# Altium PCB mackenziepcbpcbrev2.PcbDoc
Units mil, origin at the board's own origin, x right, y up, seen from the top; angles counter-clockwise.
Board outline 6000 x 4000 mil, 2 copper layers (Top Layer, Bottom Layer); 101 components, 66 nets, 363 pads, 51 vias.
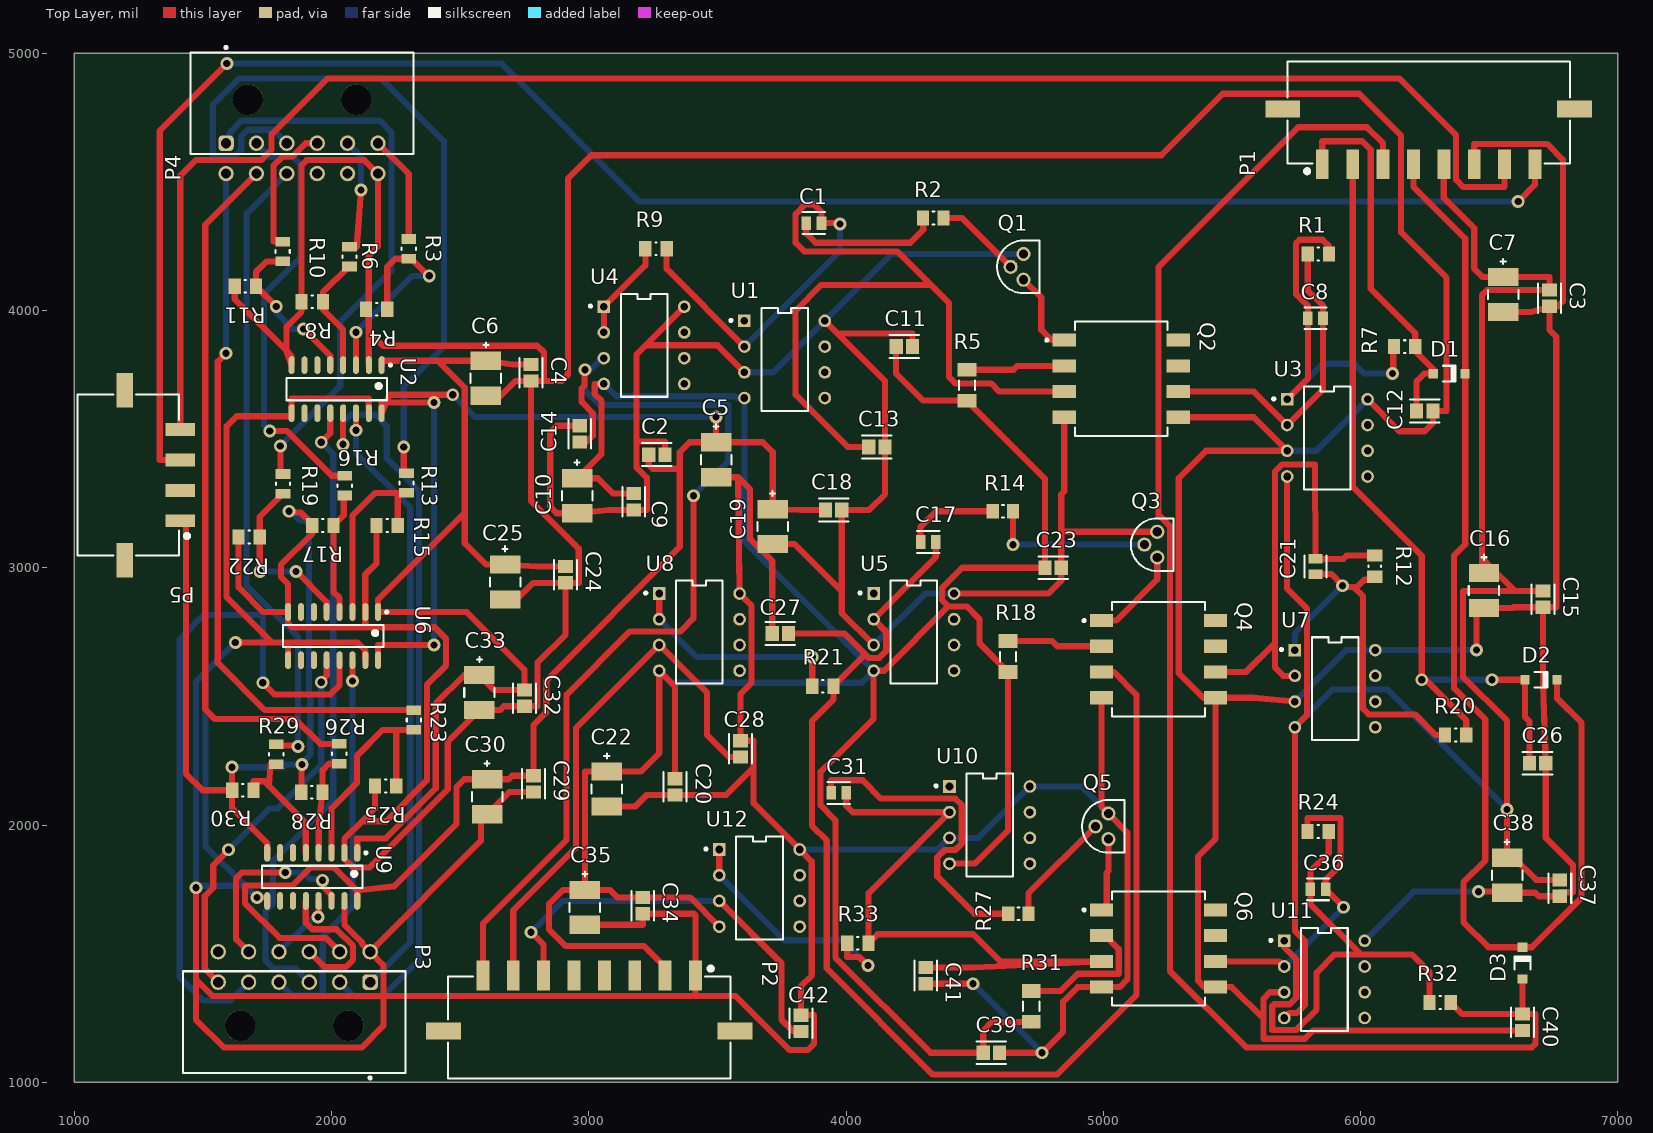
[diagram p0: Top Layer view]
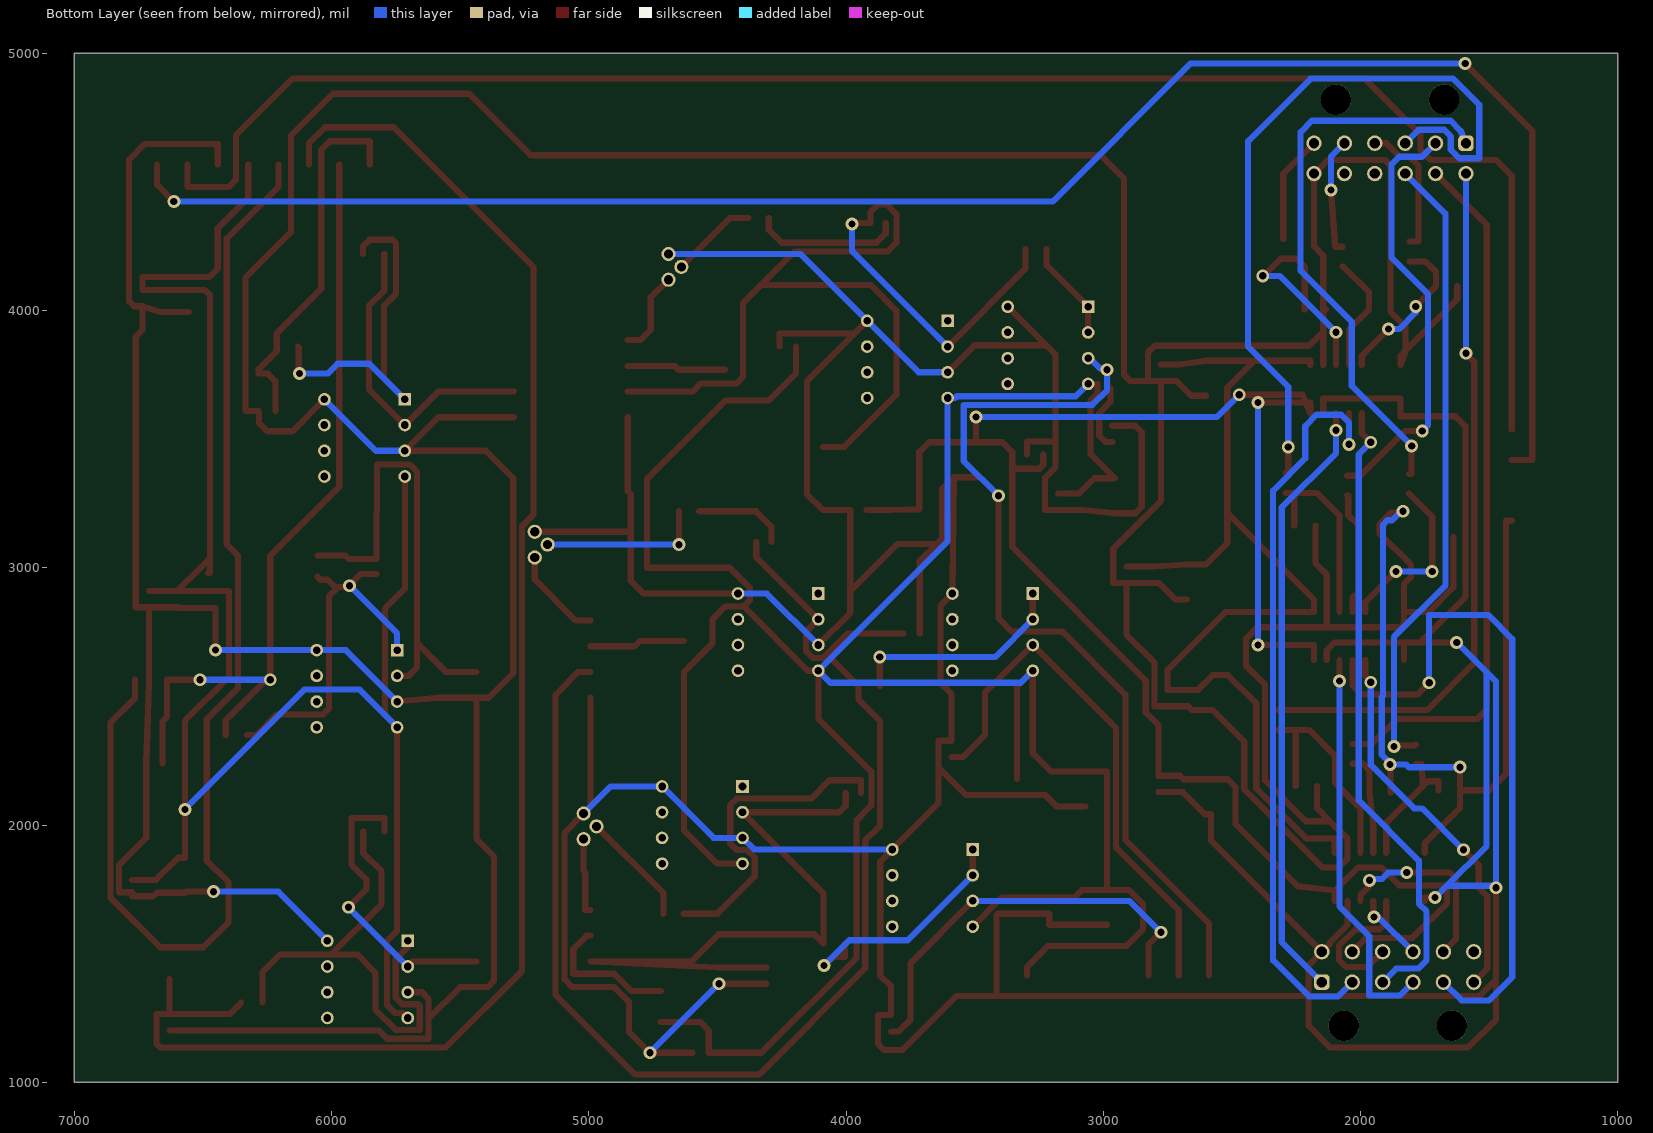
[diagram p1: Bottom Layer view, seen from below]
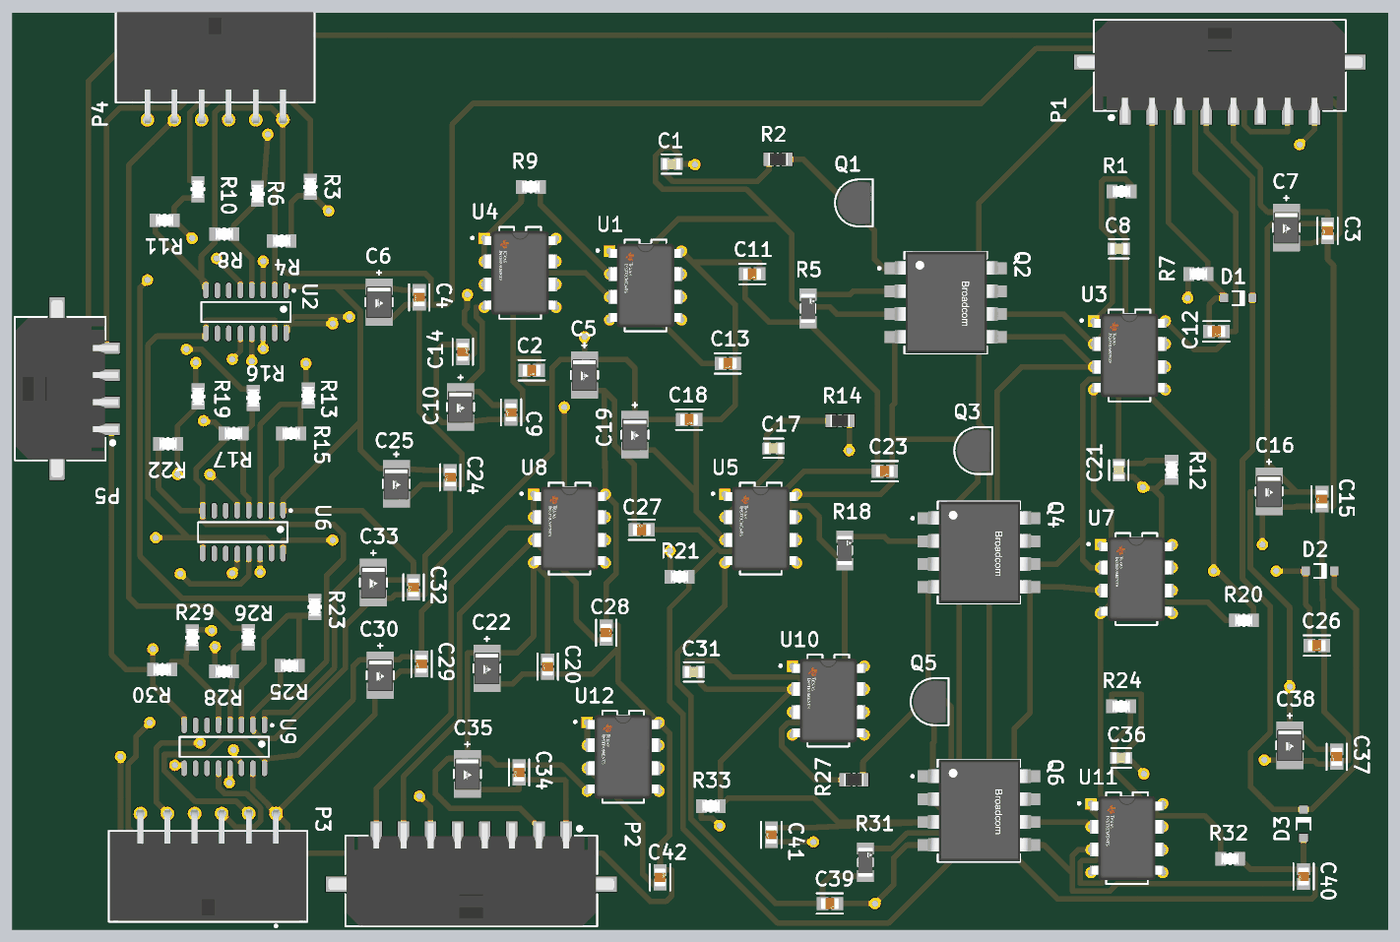
[diagram p2: 3D render of the assembled board from above, using the file's embedded part models]

## Layer stack, top to bottom
Top Solder: solder mask 0.4, Solder Resist, Dk 3.5
Top Layer: signal copper 1.4
Dielectric 1: dielectric 12.6, FR-4, Dk 4.8
Bottom Layer: signal copper 1.4
Bottom Solder: solder mask 0.4, Solder Resist, Dk 3.5

## Board outline
1000,1000 7000,1000 7000,5000 1000,5000

## Design rules (kind name [scope] priority, off if disabled: settings)
Clearance Clearance_1 [All] p1: gap=10 ignorepadtopadclearanceinfootprint=FALSE
Clearance [All] p2: gap=10 ignorepadtopadclearanceinfootprint=FALSE
HoleSize [All] p1: absolutevalues=TRUE maxlimit=120 minlimit=1 maxpercent=80.000 minpercent=20.000
PolygonConnect [All] p1: connectstyle=Relief reliefconductorwidth=10 reliefentries=4 polygonreliefangle="90 Angle" airgapwidth=10
RoutingVias [All] p1: holewidth=28 width=50 viastyle="Through Hole" minholewidth=28 minwidth=50 maxholewidth=28 maxwidth=50
SilkToSolderMaskClearance [IsPad] p1: minsilkscreentomaskgap=7.87 clearancetoexposedcopper=TRUE
SolderMaskExpansion [All] p1: expansion=4 istentingtop=FALSE
SupplyNets "Schematic Supply Nets_6" [InNet('15V0')] p1: voltage=0.000
SupplyNets "Schematic Supply Nets_3" [InNet('iso-5V0')] p2: voltage=0.000
SupplyNets "Schematic Supply Nets_2" [InNet('PGND')] p3: voltage=0.000
SupplyNets "Schematic Supply Nets" [InNet('3V3')] p4: voltage=0.000
SupplyNets "Schematic Supply Nets_5" [InNet('iso 15')] p5: voltage=0.000
SupplyNets "Schematic Supply Nets_4" [InNet('3.3V')] p6: voltage=0.000
SupplyNets "Schematic Supply Nets_1" [InNet('GND')] p7: voltage=0.000
Width [All] p1: maxlimit=24 minlimit=24 preferedwidth=24 minimp=50.000000 maximp=50.000000 favimp=50.000000
28 further rules are at their usual default settings.

## Components (designator, comment, footprint, x,y, rotation, side; value= is the part's Value field where it differs from the comment)
C1 "C0805C101K5GACTU" FP-C0805C-DN-MFG 3875,4340 r0 top value="100 pF"
C2 "08051C104K4T2A" FP-0805-L_2_01_0_2-W_1_25-IPC_B 3265,3440 r0 top
C3 "08051C104K4T2A" FP-0805-L_2_01_0_2-W_1_25-IPC_B 6735,4048.28 r270 top
C4 "08051C104K4T2A" FP-0805-L_2_01_0_2-W_1_25-IPC_B 2775,3758.28 r270 top
C5 "293D106X9010B2TE3" FP-293DB-MFG 3495,3420 r90 top
C6 "293D106X9010B2TE3" FP-293DB-MFG 2600,3737.09 r90 top
C7 "293D106X9010B2TE3" FP-293DB-MFG 6555,4062.09 r90 top
C8 "C0805C101K5GACTU" FP-C0805C-DN-MFG 5825,3970 r0 top value="100 pF"
C9 "08051C104K4T2A" FP-0805-L_2_01_0_2-W_1_25-IPC_B 3175,3256.72 r270 top
C10 "293D106X9010B2TE3" FP-293DB-MFG 2955,3280 r90 top
C11 "08051C104K4T2A" FP-0805-L_2_01_0_2-W_1_25-IPC_B 4226.72,3860 r0 top
C12 "08051C104K4T2A" FP-0805-L_2_01_0_2-W_1_25-IPC_B 6250,3610 r0 top
C13 "08051C104K4T2A" FP-0805-L_2_01_0_2-W_1_25-IPC_B 4120,3470 r0 top
C14 "08051C104K4T2A" FP-0805-L_2_01_0_2-W_1_25-IPC_B 2965,3520.75 r90 top
C15 "08051C104K4T2A" FP-0805-L_2_01_0_2-W_1_25-IPC_B 6710,2878.28 r270 top
C16 "293D106X9010B2TE3" FP-293DB-MFG 6480,2912.09 r90 top
C17 "C0805C101K5GACTU" FP-C0805C-DN-MFG 4319.53,3100 r0 top value="100 pF"
C18 "08051C104K4T2A" FP-0805-L_2_01_0_2-W_1_25-IPC_B 3951.72,3225 r0 top
C19 "293D106X9010B2TE3" FP-293DB-MFG 3715,3160 r90 top
C20 "08051C104K4T2A" FP-0805-L_2_01_0_2-W_1_25-IPC_B 3335,2148.28 r270 top
C21 "C0805C101K5GACTU" FP-C0805C-DN-MFG 5825,3005 r90 top value="100 pF"
C22 "293D106X9010B2TE3" FP-293DB-MFG 3070,2140 r90 top
C23 "08051C104K4T2A" FP-0805-L_2_01_0_2-W_1_25-IPC_B 4805,3000 r0 top
C24 "08051C104K4T2A" FP-0805-L_2_01_0_2-W_1_25-IPC_B 2910,2973.28 r270 top
C25 "293D106X9010B2TE3" FP-293DB-MFG 2675,2945 r90 top
C26 "08051C104K4T2A" FP-0805-L_2_01_0_2-W_1_25-IPC_B 6688.28,2240 r0 top
C27 "08051C104K4T2A" FP-0805-L_2_01_0_2-W_1_25-IPC_B 3745,2745 r180 top
C28 "08051C104K4T2A" FP-0805-L_2_01_0_2-W_1_25-IPC_B 3590,2295.75 r90 top
C29 "08051C104K4T2A" FP-0805-L_2_01_0_2-W_1_25-IPC_B 2785,2160 r270 top
C30 "293D106X9010B2TE3" FP-293DB-MFG 2605,2110 r90 top
C31 "C0805C101K5GACTU" FP-C0805C-DN-MFG 3971.57,2125 r0 top value="100 pF"
C32 "08051C104K4T2A" FP-0805-L_2_01_0_2-W_1_25-IPC_B 2750,2493.28 r270 top
C33 "293D106X9010B2TE3" FP-293DB-MFG 2575,2515 r90 top
C34 "08051C104K4T2A" FP-0805-L_2_01_0_2-W_1_25-IPC_B 3210,1686.72 r270 top
C35 "293D106X9010B2TE3" FP-293DB-MFG 2985,1680 r90 top
C36 "C0805C101K5GACTU" FP-C0805C-DN-MFG 5835,1750 r0 top value="100 pF"
C37 "08051C104K4T2A" FP-0805-L_2_01_0_2-W_1_25-IPC_B 6775,1755 r270 top
C38 "293D106X9010B2TE3" FP-293DB-MFG 6570,1805 r90 top
C39 "08051C104K4T2A" FP-0805-L_2_01_0_2-W_1_25-IPC_B 4565,1115 r0 top
C40 "08051C104K4T2A" FP-0805-L_2_01_0_2-W_1_25-IPC_B 6630,1233.28 r270 top
C41 "08051C104K4T2A" FP-0805-L_2_01_0_2-W_1_25-IPC_B 4310,1415 r270 top
C42 "08051C104K4T2A" FP-0805-L_2_01_0_2-W_1_25-IPC_B 3825,1229.25 r90 top
D1 "1N4148W-7-F" DIOD-SOD123-2_V 6345,3755 r0 top
D2 "1N4148W-7-F" DIOD-SOD123-2_V 6702.01,2565 r0 top
D3 "1N4148W-7-F" DIOD-SOD123-2_V 6630,1462.99 r90 top
P1 "662108145021" 662108145021 6265,4770 r180 top
P2 "662108145021" 662108145021 3001.61,1213.43 r0 top
P3 "66201221022" 66201221022 1854.76,1233.78 r0 top
P4 "66201221022" 66201221022 1885.24,4806.22 r180 top
P5 "662104145021" 662104145021 1210,3360 r270 top
Q1 "MPS2907ARLRAG" FP-29-11-MFG 4670.02,4170 r0 top
Q2 "HCNR201-500E" FP-HCNR201-500E-MFG 5070,3735 r0 top
Q3 "MPS2907ARLRAG" FP-29-11-MFG 5190.02,3090 r0 top
Q4 "HCNR201-500E" FP-HCNR201-500E-MFG 5215,2645 r0 top
Q5 "MPS2907ARLRAG" FP-29-11-MFG 5000.02,1995 r0 top
Q6 "HCNR201-500E" FP-HCNR201-500E-MFG 5215,1520 r0 top
R1 "CRCW080580K6FKEA" FP-CRCW0805-e3-IPC_A 5836.37,4220 r0 top
R2 "RC0805FR-071KL" RESC2013X60X35ML10T20 4339.37,4360 r0 top
R3 "CRCW080549R9FKEA" FP-CRCW0805-e3-MFG 2300,4240 r270 top
R4 "CRCW080510K0FKEA" FP-CRCW0805-e3-IPC_A 2175,4004.69 r180 top
R5 "CRCW1206300RFKEA" FP-CRCW1206-e3-IPC_A 4470,3710 r90 top
R6 "CRCW080549R9FKEA" FP-CRCW0805-e3-MFG 2070,4209.69 r270 top
R7 "CRCW080510K0FKEA" FP-CRCW0805-e3-IPC_A 6171.37,3860 r0 top
R8 "CRCW080510K0FKEA" FP-CRCW0805-e3-IPC_A 1925,4034.69 r180 top
R9 "CRCW080580K6FKEA" FP-CRCW0805-e3-IPC_A 3261.37,4240 r0 top
R10 "CRCW080549R9FKEA" FP-CRCW0805-e3-MFG 1810,4229.69 r270 top
R11 "CRCW080510K0FKEA" FP-CRCW0805-e3-IPC_A 1665,4094.69 r180 top
R12 "CRCW080580K6FKEA" FP-CRCW0805-e3-IPC_A 6055,3006.37 r270 top
R13 "CRCW080549R9FKEA" FP-CRCW0805-e3-MFG 2291.26,3329.69 r270 top
R14 "RC0805FR-071KL" RESC2013X60X35ML10T20 4610,3220 r0 top
R15 "CRCW080510K0FKEA" FP-CRCW0805-e3-IPC_A 2216.26,3164.69 r180 top
R16 "CRCW080549R9FKEA" FP-CRCW0805-e3-MFG 2051.26,3319.69 r270 top
R17 "CRCW080510K0FKEA" FP-CRCW0805-e3-IPC_A 1966.26,3164.69 r180 top
R18 "CRCW1206300RFKEA" FP-CRCW1206-e3-IPC_A 4630,2655 r90 top
R19 "CRCW080549R9FKEA" FP-CRCW0805-e3-MFG 1811.26,3326.3 r270 top
R20 "CRCW080510K0FKEA" FP-CRCW0805-e3-IPC_A 6370,2350 r0 top
R21 "CRCW080580K6FKEA" FP-CRCW0805-e3-IPC_A 3910,2540 r0 top
R22 "CRCW080510K0FKEA" FP-CRCW0805-e3-IPC_A 1679.88,3119.69 r180 top
R23 "CRCW080549R9FKEA" FP-CRCW0805-e3-MFG 2320,2408.39 r270 top
R24 "CRCW080580K6FKEA" FP-CRCW0805-e3-IPC_A 5835,1975 r0 top
R25 "CRCW080510K0FKEA" FP-CRCW0805-e3-IPC_A 2210,2152 r180 top
R26 "CRCW080549R9FKEA" FP-CRCW0805-e3-MFG 2030,2277 r270 top
R27 "RC0805FR-071KL" RESC2013X60X35ML10T20 4670,1655 r0 top
R28 "CRCW080510K0FKEA" FP-CRCW0805-e3-IPC_A 1923.63,2127 r180 top
R29 "CRCW080549R9FKEA" FP-CRCW0805-e3-MFG 1785,2275 r270 top
R30 "CRCW080510K0FKEA" FP-CRCW0805-e3-IPC_A 1655,2135 r180 top
R31 "CRCW1206300RFKEA" FP-CRCW1206-e3-IPC_A 4720,1295 r90 top
R32 "CRCW080510K0FKEA" FP-CRCW0805-e3-IPC_A 6310,1310 r0 top
R33 "CRCW080580K6FKEA" FP-CRCW0805-e3-IPC_A 4046.37,1540 r0 top
U1 "LM358AN/NOPB" FP-P0008A-MFG 3761.3,3810 r0 top
U2 "Si8635BC-B-IS1" SLAB-SOIC-16-NB_L 2020,3694.69 r270 top
U3 "LM358AN/NOPB" FP-P0008A-MFG 5871.3,3505 r0 top
U4 "LM358AN/NOPB" FP-P0008A-MFG 3215,3865 r0 top
U5 "LM358AN/NOPB" FP-P0008A-MFG 4263.7,2750 r0 top
U6 "Si8635BC-B-IS1" SLAB-SOIC-16-NB_L 2006.26,2734.69 r270 top
U7 "LM358AN/NOPB" FP-P0008A-MFG 5901.3,2530 r0 top
U8 "LM358AN/NOPB" FP-P0008A-MFG 3430,2750 r0 top
U9 "Si8635BC-B-IS1" SLAB-SOIC-16-NB_L 1925,1798.5 r270 top
U10 "LM358AN/NOPB" FP-P0008A-MFG 4558.7,2000 r0 top
U11 "LM358AN/NOPB" FP-P0008A-MFG 5860,1400 r0 top
U12 "LM358AN/NOPB" FP-P0008A-MFG 3663.7,1755 r0 top

## Footprints (in the part's own frame and the unit in brackets; to place one, negate y for a bottom-side part, rotate by r counter-clockwise, add the part's x,y. Pads: shape width x height; smd on the part's side, far side on the other; paste and mask are expansions set on the pad)
66201221022 [mm] "Dual row Right angle header With plastic peg 12p"
  rrect50% 1.52x1.52 hole 1.02: 1(7.5,3.95)
  round 1.52 hole 1.02: 2(4.5,3.95) 3(1.5,3.95) 4(-1.5,3.95) 5(-4.5,3.95) 6(-7.5,3.95) 7(7.5,6.95) 8(4.5,6.95) 9(1.5,6.95) 10(-1.5,6.95) 11(-4.5,6.95) 12(-7.5,6.95)
  round 3 hole 3 unplated: MH1(-5.34,-0.35) MH2(5.34,-0.35)
  silkscreen extent -11,-5.62 11,5.02, body extent -10.85,-4.95 10.85,7.27, height 8.79
662104145021 [mm] "3.00mm Male Single Row Angled Header, 4p"
  rect 1.27x2.92 smd: 1(4.5,5.12) 2(1.5,5.12) 3(-1.5,5.12) 4(-4.5,5.12)
  rect 3.43x1.65 smd: MP1(-8.395,-0.35) MP2(8.395,-0.35)
  silkscreen extent -7.95,-5.03 7.95,6, body extent -9.82,-4.95 9.82,6.4, height 5.61
662108145021 [mm] "3.00mm Male Single Row Angled Header, 8p"
  rect 1.27x2.92 smd: 1(10.5,5.12) 2(7.5,5.12) 3(4.5,5.12) 4(1.5,5.12) 5(-1.5,5.12) 6(-4.5,5.12) 7(-7.5,5.12) 8(-10.5,5.12)
  rect 3.43x1.65 smd: MP1(-14.395,-0.35) MP2(14.395,-0.35)
  silkscreen extent -13.95,-5.02 13.95,6, body extent -15.82,-4.95 15.82,6.4, height 5.61
DIOD-SOD123-2_V [mm] "SOD123, 2-Leads, Body 2.7x1.55mm, Height 1.45mm"
  rect 0.9x0.95 smd: 1(-1.575,0) 2(1.575,0)
  silkscreen extent -0.64,-0.82 0.64,0.78, body extent -1.35,-0.77 1.35,0.77, height 1.45
FP-29-11-MFG [mm]
  round 1.4 hole 0.9 paste-2539.97 mask+0: 1(0.507,-1.27) 2(-0.763,0) 3(0.507,1.27)
  silkscreen extent -2.09,-2.6 2.09,2.6, body extent -2.19,-2.7 2.19,2.7, height 0.25
FP-293DB-MFG [mm]
  rect 1.8x3 smd paste+0 mask+0: 1(-1.725,0) 2(1.725,0)
  silkscreen extent -0.45,-1.5 3.53,1.5, body extent -2.73,-1.6 2.73,1.6, height 0.25
FP-0805-L_2_01_0_2-W_1_25-IPC_B [mil]
  rect 51.36x57.33 smd paste+0 mask+0: 1(-31.72,0) 2(31.72,0)
  silkscreen extent -57,-44 57,44, body extent -67,-39 67,39, height 10
FP-C0805C-DN-MFG [mm]
  rect 0.95x1.35 smd paste+0 mask+0: 1(-0.75,0) 2(0.75,0)
  silkscreen extent -1.1,-1.07 1.1,1.07, body extent -1.4,-0.85 1.4,0.85, height 0.25
FP-CRCW0805-e3-IPC_A [mil]
  rect 47.5x59.38 smd paste+0 mask+0: 1(-41.37,0) 2(41.37,0)
  silkscreen extent -3,-25 3,25, body extent -85,-49 85,49, height 10
FP-CRCW0805-e3-MFG [mm]
  rect 0.95x1.45 smd paste+0 mask+0: 1(-0.975,0) 2(0.975,0)
  silkscreen extent -0.13,-0.7 0.13,0.7, body extent -1.55,-0.82 1.55,0.82, height 0.25
FP-CRCW1206-e3-IPC_A [mil]
  rect 53.39x73.16 smd paste+0 mask+0: 1(-60.08,0) 2(60.08,0)
  silkscreen extent -19,-31 19,31, body extent -106,-56 106,56, height 10
FP-HCNR201-500E-MFG [mm]
  rect 2.29x1.3 smd paste+0 mask+0: 1(-5.635,3.81) 2(-5.635,1.27) 3(-5.635,-1.27) 4(-5.635,-3.81) 5(5.635,-3.81) 6(5.635,-1.27) 7(5.635,1.27) 8(5.635,3.81)
  silkscreen extent -7.47,-5.65 4.57,5.65, body extent -6.88,-5.75 6.88,5.75, height 0.25
FP-P0008A-MFG [mm]
  rect 1.25x1.25 hole 0.75 paste-2539.97 mask+0: 1(-3.97,3.81)
  round 1.25 hole 0.75 paste-2539.97 mask+0: 2(-3.97,1.27) 3(-3.97,-1.27) 4(-3.97,-3.81) 5(3.97,-3.81) 6(3.97,-1.27) 7(3.97,1.27) 8(3.97,3.81)
  silkscreen extent -5.42,-5.08 2.3,5.08, body extent -4.69,-5.18 4.69,5.18, height 0.25
RESC2013X60X35ML10T20 [mm] "Chip Resistor, 2-Leads, Body 2.1x1.35mm, IPC Low Density"
  rect 1.2x1.45 smd: 1(-1,0) 2(1,0)
  silkscreen extent -0.1,-0.62 0.1,0.62, body extent -1.05,-0.68 1.05,0.67, height 0.6
SLAB-SOIC-16-NB_L [mm] "SOIC, 16-Leads, Body 9.9x3.9mm, Pitch 1.27mm, IPC High Density"
  oval 1.75x0.6 smd: 1(-2.375,4.445) 2(-2.375,3.175) 3(-2.375,1.905) 4(-2.375,0.635) 5(-2.375,-0.635) 6(-2.375,-1.905) 7(-2.375,-3.175) 8(-2.375,-4.445) 9(2.375,-4.445) 10(2.375,-3.175) 11(2.375,-1.905) 12(2.375,-0.635) 13(2.375,0.635) 14(2.375,1.905) 15(2.375,3.175) 16(2.375,4.445)
  silkscreen extent -2.5,-4.95 1.1,5.42, body extent -1.95,-4.95 1.95,4.95, height 1.75

## Part data
C1 C8 C17 C21 C31 C36: library part CMP-03020-021029-1, "CAP CER 100PF 50V C0G/NP0 0805", Capacitance="100 pF", Manufacturer=KEMET, Package=C0805C-DN, Temperature="-55°C to +125°C", Temperature Characteristic=C0G, Temperature Coefficient=30ppm/°C, Temperature Range High=+125°C, Temperature Range Low=-55°C, Tolerance=0.1, Voltage Rating="50 V", Automotive=No, Category=Cap, ComponentLink2Description=Datasheet, ComponentLink2URL=https://content.kemet.com/datasheets/KEM_C1003_C0G_SMD.pdf, Device Class L1="Passive Components", Device Class L2=Capacitors, Device Class L3="Ceramic Capacitors", Digikey Description="CAP CER 100PF 50V C0G/NP0 0805", Height=0.88mm, Ipc Land Pattern Name=CAPC200125X78, Lead Free=Yes, Manufacturer Part Number=C0805C101K5GACTU, Material=Ceramic, Mouser Description="Multilayer Ceramic Capacitors MLCC - SMD/SMT 50volts 100pF C0G 10%", Octopart=https://octopart.com/c0805c101k5gactu-kemet-109877, RoHS=TRUE
C2 C3 C4 C9 C11 C12 C13 C14 C15 C18 C20 C23 C24 C26 C27 C28 C29 C32 C34 C37 C39 C40 C41 C42: library part CMP-2007-04172-2, "Automotive Ceramic Capacitor, 0805, 100nF, 10%, X7R, 15%, 100V", Capacitance=100nF, Case Code (Imperial)=0805, Case Code (Metric)=2012, Dielectric=X7R, Dielectric Material=Ceramic, Max Operating Temperature=125°C, Min Operating Temperature=-55°C, Package Quantity=1, Ratings=AEC-Q200, Tolerance=10%, Voltage=100V, Case/Package=0805, Construction=Flat, Depth=1.25mm, Height=1.4mm, Lead Free="Lead Free", Length=2.01mm, Mount="Surface Mount", Number of Pins=2, Packaging="Tape and Reel", Radiation Hardening=No, REACH SVHC="No SVHC", RoHS Compliant=Yes, Series=-, Termination=SMD/SMT, Thickness=0.055inch, Voltage Rating=100V, Voltage Rating (DC)=100V, Width=0.049inch
C5 C6 C7 C10 C16 C19 C22 C25 C30 C33 C35 C38: library part CMP-02414-000013-1, "CAP TANT 10UF 10% 10V 1411", Capacitance=10uF, Case Code (Imperial)=1411, Case Code (Metric)=3528, Dielectric Material=Tantalum, ESR (Equivalent Series Resistance)=2.5R, Leakage Current=1uA, Max Operating Temperature=125°C, Min Operating Temperature=-55°C, Package Quantity=2000, Ripple Current=150mA, Tolerance=10%, Voltage=10V, Case/Package=1411, Construction=Flat, Depth=2.8mm, Dissipation Factor=6%, Features="General Purpose", Height=1.9mm, Height - Seated (Max)=0.083inch, Lead Free="Lead Free", Length=3.5mm, Mount="Surface Mount", Packaging="Tape and Reel", Polarity=Polar, Q Factor=6, Radiation Hardening=No, RoHS Compliant=Yes, Series="TANTAMOUNT®, 293D", Termination=SMD/SMT, Voltage Rating=10V, Voltage Rating (DC)=10V, Width=1.9mm
D1 D2 D3: library part CMP-2000-04932-2, "Fast Switching Diode, 100 V, 0.15 A, -65 to 150 degC, 2-Pin?SOD123, RoHS, Tape and Reel", If - Forward Current=0.15A, Ir - Reverse Current=1uA, Manufacturer=DiodesIncorporated, Max Surge Current=2A, Maximum Operating Temperature=+150C, Minimum Operating Temperature=-65C, Operating Temperature Range=-65Cto+150C, Package / Case=SOD-123, Package Reference=SOD123-2, Peak Reverse Voltage=100V, Vf - Forward Voltage=1.25V, Brand=DiodesIncorporated, Configuration=Single, Datasheet URL=http://www.farnell.com/datasheets/1915529.pdf, Datasheet Version="Rev. 24-2, 10/2013", Factory Pack Quantity=3000, Height=1.25mm, Length=2.85mm, Manufacturer URL=http://www.diodes.com/, Mounting Style=SMD/SMT, Package URL=http://www.diodes.com/datasheets/ds18004.pdf, Packaging=Reel, Product=SwitchingDiodes, Product Category=Diodes-GeneralPurpose,Power,Switching, Recovery Time=4ns, RoHS=True, Series=1N4148, Type=SwitchingDiode, Unit Weight=0.000353oz, Width=1.7mm
P1 P2: library part CMP-1502-00488-2, Color=Black, Contact Resistance=10mΩ, Current Rating=5A, Insulation Resistance=1GΩ, Max Operating Temperature=105°C, Min Operating Temperature=-40°C, Operating Supply Voltage=250V, Connector Type="Male Pin, Socket", Contact Material=Copper, Contact Plating=Tin, Fastening Type=Ramp, Gender=Male, Height=14mm, Lead Pitch=3mm, Length=27.65mm, Mount="Surface Mount", NexarPartId=23024787, Number of Contacts=8, Number of Pins=8, Number of Positions=8, Number of Rows=1, Packaging="Tape and Reel", Pitch=3mm, REACH SVHC=Unknown, RoHS=Compliant, Termination=Solder, Width=12.85mm
P3 P4: library part CMP-1502-00369-2, Color=Black, Contact Resistance=10mΩ, Current Rating=5A, Insulation Resistance=1GΩ, Max Operating Temperature=105°C, Min Operating Temperature=-40°C, Operating Supply Voltage=250V, Connector Type="Male Pin, Socket", Contact Material=Copper, Contact Plating=Tin, Fastening Type=Latch, Gender=Male, Height=8.9mm, Lead Pitch=3mm, Length=21.7mm, Mount="Through Hole", NexarPartId=23024718, Number of Contacts=12, Number of Pins=12, Number of Positions=12, Number of Rows=2, Pitch=3mm, REACH SVHC=Unknown, RoHS=Compliant, Row Spacing=2.9972mm, Termination=Solder, Width=21.7mm
P5: library part CMP-1502-00484-2, Color=Black, Contact Resistance=10mΩ, Current Rating=5A, Insulation Resistance=1GΩ, Max Operating Temperature=105°C, Min Operating Temperature=-40°C, Operating Supply Voltage=250V, Connector Type="Male Pin, Socket", Contact Material=Copper, Contact Plating=Tin, Fastening Type=Ramp, Gender=Male, Height=14mm, Lead Pitch=3mm, Length=15.65mm, Mount="Surface Mount", NexarPartId=23024783, Number of Contacts=4, Number of Pins=4, Number of Positions=4, Number of Rows=1, Packaging="Tape and Reel", Pitch=3mm, REACH SVHC=Unknown, RoHS=Compliant, Termination=Solder, Width=6.85mm
Q1 Q3 Q5: library part CMP-1048-01537-2, Case/Package=TO-92, Collector Base Voltage (VCBO)=-60V, Collector Emitter Saturation Voltage=-1.6V, Current Rating=-600mA, Emitter Base Voltage (VEBO)=-5V, Frequency=200MHz, Manufacturer Lifecycle Status=OBSOLETE, Max Breakdown Voltage=60V, Max Collector Current=600mA, Max Junction Temperature (Tj)=150°C, Max Power Dissipation=625mW, Min Operating Temperature=-55°C, Collector Emitter Breakdown Voltage=-60V, Collector Emitter Voltage (VCEO)=-60V, Contact Plating="Copper, Silver, Tin", Element Configuration=Single, Gain Bandwidth Product=200MHz, Height=5.33mm, hFE Min=75, Lead Free="Lead Free", Length=5.2mm, Lifecycle Status=Obsolete, Max Frequency=200MHz, Max Operating Temperature=150°C, NexarPartId=358202, Number of Elements=1, Number of Pins=3, Packaging="Cut Tape", Polarity=PNP, Power Dissipation=625mW, Radiation Hardening=No, REACH SVHC=Unknown, RoHS=Compliant, Schedule B=8541210080, Transition Frequency=200MHz, Voltage Rating (DC)=-60V, Width=4.19mm
Q2 Q4 Q6: library part CMP-18400-000025-2, "OPTOISO 5KV LINEAR PHVOLT 8DIPGW", Case/Package=SMD/SMT, Current Transfer Ratio=0.72%, Forward Current=25mA, Forward Voltage=1.6V, Input Current=20mA, Isolation Voltage=5kV, Max Operating Temperature=100°C, Max Power Dissipation=60mW, Min Operating Temperature=-55°C, Output Voltage=15V, Package Quantity=1, Reverse Breakdown Voltage=2.5V, Contact Plating=Tin, Input Type=DC, Isolation Voltage-Max=5kV, Lead Free="Lead Free", Max Input Current=25mA, Mount="Surface Mount", Number of Channels=1, Number of Elements=1, Number of Pins=8, Packaging="Tape and Reel", Power Dissipation=60mW, Radiation Hardening=No, REACH SVHC="No SVHC", Reverse Voltage (DC)=2.5V, RoHS Compliant=Yes, Series=-
R1 R9 R12 R21 R24 R33: library part CMP-2001-04127-2, "RES Thick Film, 80.6kΩ, 1%, 0.125W, 100ppm/°C, 0805", Case Code (Imperial)=0805, Case Code (Metric)=2012, Max Operating Temperature=155°C, Max Power Dissipation=125mW, Min Operating Temperature=-55°C, Package Quantity=10, Resistance=80.6kR, Temperature Coefficient=100ppm/°C, Tolerance=1%, Voltage Rating=150V, Case/Package=0805, Composition="Thick Film", Contact Plating=Tin, Depth=1.25mm, Features="Automotive AEC-Q200", Height=0.45mm, Lead Free="Lead Free", Length=2mm, Military Standard=Not, Number of Pins=2, Number of Terminations=2, Packaging="Tape and Reel", Power Rating=125mW, Radiation Hardening=No, Termination=Solder, Voltage Rating (DC)=150V, Weight=0.000194oz, Width=1.25mm
R2 R14 R27: library part CMP-2100-03671-1, "Chip Resistor, 1 KOhm, +/- 1%, 125 mW, -55 to 155 degC, 0805 (2012 Metric), RoHS, Tape and Reel", Case Code (Imperial)=0805, Case Code (Metric)=2012, Manufacturer=Yageo, Max Operating Temperature=155degC, Max Power Dissipation=125mW, Min Operating Temperature=-55degC, Package Description="2-Pin Surface Mounted Device, Body 2 x 1.25 mm", Package Quantity=1, Resistance=1KOhm, Temperature Coefficient=100ppm/degreesC, Tolerance=1%, Voltage Rating=150V, Case/Package=0805, Composition=ThickFilm, Datasheet URL=http://www.yageo.com/NewPortal/yageodocoutput?fileName=/pdf/R-Chip/PYu-RC_Group_51_RoHS_L_5.pdf, Datasheet Version="Rev. 5, 10/2016", Depth=1.25mm, Height=0.024inch, Lead Free=LeadFree, Length=0.079inch, Manufacturer URL=http://www.yageo.com/, Military Standard=Not, Number of Pins=2, Number of Terminations=2, Package Reference=0805, Packaging=TapeandReel, Power Rating=125mW, REACH SVHC=Unknown, RoHSCompliant=true, Termination=SMD/SMT, Voltage Rating (DC)=150V, Width=0.049inch
R3 R6 R10 R13 R16 R19 R23 R26 R29: library part CMP-2001-03954-2, "RES Thick Film, 49.9Ω, 1%, 0.125W, 100ppm/°C, 0805", Case Code (Imperial)=0805, Case Code (Metric)=2012, Max Operating Temperature=155°C, Max Power Dissipation=125mW, Min Operating Temperature=-55°C, Package Quantity=10, Resistance=49.9R, Temperature Coefficient=100ppm/°C, Tolerance=1%, Voltage Rating=150V, Case/Package=0805, Composition="Thick Film", Contact Plating=Tin, Depth=1.25mm, Features="Automotive AEC-Q200", Height=0.45mm, Lead Free="Lead Free", Length=2mm, Military Standard=Not, Number of Terminations=2, Packaging="Tape and Reel", Power Rating=125mW, Termination=SMD/SMT, Voltage Rating (DC)=150V, Weight=0.000194oz, Width=1.25mm
R4 R7 R8 R11 R15 R17 R20 R22 R25 R28 R30 R32: library part CMP-2001-04908-2, "RES Thick Film, 10kΩ, 1%, 0.125W, 100ppm/°C, 0805", Case Code (Imperial)=0805, Case Code (Metric)=2012, Max Operating Temperature=155°C, Min Operating Temperature=-55°C, Package Quantity=5000, Power Rating=125mW, Resistance=10kR, Temperature Coefficient=100ppm/°C, Tolerance=1%, Voltage Rating=150V, Case/Package=0805, Composition="Thick Film", Contact Plating=Tin, Depth=1.25mm, Height=0.45mm, Lead Free="Lead Free", Length=2mm, Military Standard=Not, Packaging="Tape and Reel", Radiation Hardening=No, Termination=SMD/SMT, Voltage Rating (DC)=150V, Weight=0.000194oz, Width=1.25mm
R5 R18 R31: library part CMP-1014-00449-3, "RES Thick Film, 300Ω, 1%, 0.25W, 100ppm/°C, 1206", Case Code (Imperial)=1206, Case Code (Metric)=3216, Max Operating Temperature=155°C, Max Power Dissipation=250mW, Min Operating Temperature=-55°C, Package Quantity=10, Resistance=300R, Temperature Coefficient=100ppm/°C, Tolerance=1%, Voltage Rating=200V, Case/Package=1206, Composition="Thick Film", Contact Plating=Tin, Depth=1.6mm, Features="Automotive AEC-Q200", Height=0.55mm, Lead Free="Lead Free", Length=3.2mm, Military Standard=Not, Mount="Surface Mount", Number of Terminations=2, Packaging="Tape and Reel", Power Rating=250mW, Radiation Hardening=No, Termination=SMD/SMT, Voltage Rating (DC)=200V, Weight=0.000353oz, Width=0.063inch, Working Voltage=200V
U1 U3 U4 U5 U7 U8 U10 U11 U12: library part CMP-04895-000025-1, "IC OPAMP GP 2 CIRCUIT 8DIP", Input Bias Current=0.045uA, Input Offset Voltage=2mV, Manufacturer="Texas Instruments", Max Dual Supply Voltage=16V, Max Supply Voltage=32V, Min Dual Supply Voltage=1.5V, Min Supply Voltage=3V, Nominal Supply Current=0.5-1mA, Output Current Per Channel=20mA, Package=P0008A, Temperature="0°C to +70°C", Temperature Range High=+70°C, Temperature Range Low=0°C, Voltage Gain=100V/mV, Automotive=No, Category=IC, ComponentLink2Description=Datasheet, ComponentLink2URL=http://www.ti.com/lit/ds/symlink/lm358-n.pdf, Device Class L1="Integrated Circuits (ICs)", Device Class L2="Linear ICs", Device Class L3="Amplifiers - Op Amps", Digikey Description="IC OPAMP GP 2 CIRCUIT 8DIP", Gain Bandwidth=1MHz, Height=5.08mm, Ipc Land Pattern Name=DIP794W46P254L1016H508Q8, Lead Free=Yes, Manufacturer Part Number=LM358AN/NOPB, Mouser Description="Operational Amplifiers - Op Amps LOW PWR DUAL OP AMP", Number of Channels=2, Octopart=https://octopart.com/lm358an%2Fnopb-texas+instruments-24814014, RoHS=TRUE, Standoff Height=0.51mm
U2 U6 U9: library part CMP-0512-00173-1, "Low-Power Triple-Channel Digital Isolator, 150 Mbps, 3.75 kVRMS Isolation Rating, -40 to 125 degC, 16-pin SOIC", Isolation Rating (kV)=3.75, Manufacturer="Silicon Labs", 10kV surge=FALSE, AEC-Q100=TRUE, Channel Type=Unidirectional, Code_IPC=J-STD-020, Code_JEDEC=MS-012, ComponentLink1Description="Manufacturer URL", ComponentLink1URL=http://www.silabs.com/, ComponentLink2Description=Datasheet, ComponentLink2URL=http://www.silabs.com/Support%20Documents/TechnicalDocs/Si863x.pdf, ComponentLink3Description="Package Specification", ComponentLink3URL=http://www.silabs.com/Support%20Documents/TechnicalDocs/si2401.pdf, DatasheetVersion="Rev. 1.3", Enable Control=TRUE, Maximum Data Rate (Mbps)=150, Maximum Propagation Delay (ns)=13, Mounting Technology="Surface Mount", PackageDescription="16-Pin Small-Outline Integrated Circuit, Body 9.9 x 3.9 mm, Pitch 1.27 mm", PackageReference=SOIC-16-NB, PartNumber=Si8635BC-B-IS1, Sub-Family=Isolators

## Via types
v1: diameter 50, hole 28, Top Layer to Bottom Layer, 51 vias

## Nets (pads, with @x,y where several pads share a name; then routed paths per layer and width w, separated by ;. In a path a pad name is that pad's centre, name@x,y a point inside that pad or via, vN(x,y) a via of type N, cw(c..) or ccw(c..) an arc to the next point about the centre after c; other vN are vias at no path point)
3.3V: D1.2 D2.2 D3.2 P1.4 | length 4598.5
  Top Layer w24: P1.4 6205.94,4481.06 6407.01,4279.99 D1.2 6407.01,3091.01 6364,3048 6364,2531.75 6485,2410.75 6485,1862 6400,1777 6400,1623 6498,1525 D3.2 6666.33,1525 6859.67,1718.34 6859.67,2397.33 6764.02,2492.98 D2.2
3V3: C4.1 C6.2 C24.1 C25.2 C32.1 C33.2 U2.1 U6.1 U9.1 | length 4230.1
  Top Layer w24: U9.1 2100,1948 2210.54,1948 2405,2142.46 2405,2472.91 2515,2582.91 C33.2 2632.91,2525 C32.1 2750,2604.17 2526.17,2828 2181.26,2828 U6.1 2181.26,2877 2518,3213.74 ; U2.1 2195,3805 2413,3805 ; C4.1 2703,3790 C6.2 2413,3805 ; C24.1 2800.91,3005 C25.2 2600,3012.91 2518,3094.91 2518,3213.74 ; 2413,3805 2518,3700 2518,3213.74
15V0: C3.1 C7.2 C15.1 C16.2 C37.1 C38.2 P1.5 U3.4 U7.4 U11.4 | length 7312.3
  Top Layer w24: U11.4 5723.09,1269.39 5753.7,1269.39 5784.31,1300 5784.31,1549.69 5745,1589 U7.4 5792,2427 5792,2842 5715,2919 U3.4 ; P1.5 6324.06,4437.94 6442,4320 6442,4163 6475,4130 C7.2 6735,4130 C3.1 6492,4080 6473,4061 6473,3037 ; C16.2 6473,2980 6473,3037 ; C15.1 6600,2910 ; C37.1 6683,1786.72 6596.81,1872.91 C38.2 v1(6570,2061) 6570,2405.28 6398,2577.28 6398,2910 6600,2910 ; 6473,3037 6505,3005 6600,2910
  Bottom Layer w24: U7.4 5892,2527 6104,2527 v1(6570,2061)
GND: C3.2 C4.2 C6.1 C7.1 C12.2 C15.2 C16.1 C24.2 C25.1 C26.2 C32.2 C33.1 C37.2 C38.1 C40.2 P1.6 P4.12 P5.1 Q2.5 Q4.5 Q6.5 R4.2 R8.2 R11.2 R15.2 R17.2 R22.2 R25.2 R28.2 R30.2 U2.2 U2.8 U3.3 U3.8 U6.2 U6.8 U7.3 U7.8 U9.2 U9.8 U11.3 U11.8 | length 29433.8
  Top Layer w24: P5.1 1434,3182.83 1434,2200 1499,2135 R30.2 ; v1(1613.63,2225) R30.2 ; R11.2 1623.63,4044.34 1825,3842.97 ; R22.2 1638.51,2924.49 1735,2828 U6.8@1831.26,2828 ; U9.8 1750,1928.63 1613.63,2065 R30.2 ; v1(1835,3220) 1839.97,3215.03 1880.48,3215.03 1924.88,3170.63 1924.88,3133 1803,3011.12 1803,2965.16 1831.26,2936.91 U6.8 U6.8@1831.26,2828 ; R28.2 1883.63,2128.37 1883.63,2233.63 v1(1885,2235) ; R4.2 R4.2@2145,4004.69 ; U2.2 2145,3918 ; R25.2 2168.63,2065 2118.63,2015 ; R15.2 2174.88,3017.63 2131.26,2974 U6.2 2131.26,2769 ; C6.1 2658,3669.17 2715.38,3726.55 C4.2 ; C25.1 2720.45,2877.09 2784.91,2941.55 C24.2 ; Q2.5 5585,3585 U3.3 5400,3455 5293.56,3348.56 5293.56,2590.44 5389,2495 Q4.5 Q4.5@5437,2495 ; U11.3 5648.09,1350 5623.09,1325 5623.09,1246.91 ; U7.3 5583,2495 Q4.5@5437,2495 ; U3.8 6151.6,3531 6250,3531 6281.72,3562.72 C12.2 6335,3610 6335,4127 6158,4304 6158,4680 5995,4843 5465,4843 5226,4604 3010,4604 2919,4513 2919,3749.55 2896,3726.55 2826,3726.55 ; P1.6 6442.17,4647.91 6725.39,4647.91 6787,4586.3 6787,4036 6767.55,4016.55 C3.2 ; v1(6451,2680) 6451,2844.17 C16.1 6593,2844.17 6595.38,2846.55 C15.2 ; v1(6458.96,1741.04) 6566.04,1741.04 C38.1 6679,1737.09 6692.81,1723.28 C37.2 6775,1739 6825.67,1739 6825.67,1845 6720,1950.67 C26.2 6710,2553 C15.2 ; C7.1 6665,3994.17 C3.2 ; C40.2 5816.47,1201.55 5784.31,1169.39 5623.09,1169.39 5623.09,1246.91 ; 1825,3842.97 1845,3822.97 U2.8 1825,3842.97 ; 1825,3842.97 1825,3937.51 1883.63,3996.14 R8.2 1883.63,4564.63 1904,4585 2128.11,4585 P4.12 2180.51,4249.51 2145,4214 R4.2@2145,4004.69 ; U6.8@1831.26,2828 1831.26,2784 1846.26,2769 2131.26,2769 ; 2118.63,2015 2212.69,2015 2371,2173.31 2371,2546 2445,2620 2445,2725 2401,2769 2131.26,2769 ; 2118.63,2015 2050,1946.37 U9.2 2050,1869 2084,1835 2148,1835 2452,2139 2452,2324.09 C33.1 2655,2447.09 2669.47,2461.55 C32.2 2800.67,2461.55 2800.67,2631 2910,2740.33 C24.2 ; 2145,3918 R4.2@2145,4004.69 ; 2145,3918 2200,3863 2800,3863 2826,3837 2826,3726.55 ; C4.2 2826,3726.55 ; C4.2 2775,3261 2961,3075 2961,2941.55 C24.2 ; Q4.5@5437,2495 5437,1946 5369,1878 5369,1393.78 5392.78,1370 Q6.5 5500,1370 5623.09,1246.91 ; C15.2 6761,2846.55 6761,3898.17 6735,3924.17 C3.2
  Bottom Layer w24: v1(1613.63,2225) 1812,2225 1822,2235 v1(1885,2235) 1885,2242.04 1917,2274.04 1917,2497.03 1912,2502.03 1912,3168 1895.03,3184.97 1877.07,3184.97 1842.04,3220 v1(1835,3220) ; U3.3 5827.6,3455 U3.8 ; U7.3 5945,2680 U7.8 v1(6451,2680) ; U11.8 6207.34,1741.04 v1(6458.96,1741.04)
"iso 15": C9.1 C10.2 C11.1 C20.1 C22.2 C23.1 C34.1 C35.2 C39.1 P2.2 R5.1 R18.1 R31.1 U1.4 U4.4 U5.4 U8.4 U10.4 U12.4 | length 11975.4
  Top Layer w24: U4.4 3023,3715 3023,3675.63 3049.67,3648.96 3049.67,3442.58 C10.2 3035,3347.91 3094.47,3288.45 C9.1 ; P2.2 3296.89,1447 3213.89,1530 2909,1530 2845,1594 2845,1692.91 2900,1747.91 C35.2 ; C20.1 3335,2538.7 U8.4 3273.7,2279.61 3202,2207.91 C22.2 2985,2207.91 C35.2 ; U12.4 3393.95,1718.45 C34.1 3111.47,1718.45 3082,1747.91 C35.2 ; C11.1 4195,3754.92 4300,3649.92 R5.1 4773.28,3346.64 C23.1 4452,3000 4373,2921 4373,2875 4398,2850 ; U10.4 4500,1850 4630,1980 R18.1 4519,2705.92 4519,2800 4469,2850 4398,2850 ; R31.1 4567,1234.92 4533.28,1201.19 C39.1 4328.53,1115 3959,1484.53 3959,2018.35 3901.35,2076 3901.35,2207.55 4107.4,2413.61 U5.4 4148,2600 4398,2850
  Bottom Layer w24: U4.4 3106.7,3667 3569,3667 3576,3660 U1.4 3605,3102.4 U5.4 4060.4,2553 3320.7,2553 U8.4
iso-5V0: C2.1 C5.2 C18.1 C19.2 C29.1 C30.2 P3.8 U2.16 U6.16 U9.16 | length 7433.6
  Top Layer w24: P3.8 1978.33,1561 1798,1561 1663,1696 1663,1765 1849,1765 1919.55,1835.55 2009.45,1835.55 2100,1745 ; U9.16 2100,1745 ; U6.16 2181.26,2700 v1(2398,2700) ; v1(2398,3643) 2212.47,3643 ; v1(2471,3673) 2225,3673 2212.47,3643 ; C2.1 3233.28,3400 3248.28,3385 3354,3385 ; v1(3495,3586) C5.2 ; C18.1 3820.91,3225 C19.2 3715,3450 3677.09,3487.91 C5.2 ; 2100,1745 2243.49,1761.91 2486.26,2004.69 2486.26,2148.18 2516,2177.91 C30.2 2688,2177.91 2701.81,2191.72 C29.1 2785,2388 2834.67,2437.67 2834.67,2561.67 3354,3081 3354,3385 ; 2212.47,3643 2195,3643 U2.16 2212.47,3643 ; 3354,3385 3354,3450 3391.91,3487.91 C5.2
  Bottom Layer w24: v1(2398,2700) v1(2398,3643) ; v1(2471,3673) 2558,3586 v1(3495,3586)
NetC1_1: C1.1 R2.1 | length 576.2
  Top Layer w24: C1.1 3845.47,4300 3881.47,4264 4250,4264 4300,4314 R2.1
NetC1_2: C1.2 C13.1 Q2.3 R9.2 U1.2 | length 4209.1
  Top Layer w24: R9.2 3302.74,4162.26 U1.2 ; v1(3977,4337) 3974,4340 C1.2 3904.53,4383.47 3875,4413 3842,4413 3804,4375 3804,4262.87 3836.87,4230 4200,4230 4330,4100 ; C13.1 4007,3470 3804,3673 3804,4000 3904,4100 4330,4100 ; Q2.3 4596,3685 4564,3717 4425,3717 4400,3742 4400,4030 4330,4100
  Bottom Layer w24: U1.2 3977,4232 v1(3977,4337)
NetC8_1: C8.1 R1.2 R7.1 U3.1 | length 1422.9
  Top Layer w24: U3.1 5795.47,3735.47 C8.1 5795.47,4019 5749,4065.47 5749,4260.94 5763.06,4275 5851.94,4275 5877.74,4249.19 R1.2 ; v1(6125,3755) 6127.5,3757.5 6127.5,3857.5 R7.1
  Bottom Layer w24: U3.1 5853,3793 5976.48,3793 6014.48,3755 v1(6125,3755)
NetC8_2: C8.2 Q2.6 R1.1 U3.2 | length 1224.4
  Top Layer w24: Q2.6 5585,3685 U3.2 5854.53,3694.53 C8.2 5854.53,4018.47 5795,4078 R1.1
NetC12_1: C12.1 D1.1 P1.1 R7.2 | length 1454.4
  Top Layer w24: P1.1 5851.61,4658 6007,4658 6040,4625 6040,4084.74 6212.74,3912 R7.2 6212.74,3842.25 6282.99,3772 D1.1 6248.28,3755 6218.28,3725 C12.1
NetC14_1: C14.1 P2.8 U4.3 | length 3821.5
  Top Layer w24: P2.8 2588.23,1616.23 2914,1942 2914,2507 3160,2753 3357,2753 3407,2803 v1(3407,3280) ; C14.1 2991,3489.02 3015.67,3513.69 3015.67,3601 2972,3644.67 2972,3697.32 2983.68,3709 2983.68,3768.68 v1(2985,3770)
  Bottom Layer w24: U4.3 3053.04,3815 3013.01,3774.97 2989.97,3774.97 v1(2985,3770) 2985,3691 3043,3633 3542,3633 3542,3415 v1(3407,3280)
NetC17_1: C17.1 R14.1 | length 365.5
  Top Layer w24: C17.1 4290,3160 4350,3220 R14.1
NetC17_2: C17.2 C27.1 Q4.3 R21.2 U5.2 | length 5146.4
  Top Layer w24: C27.1 3993.1,2745 4074.73,2663.36 ; C17.2 4349.06,3041.66 U5.2 4155,2752.4 4155,2675 4130,2650 4088.1,2650 4074.73,2663.36 ; Q4.3 5041,2595 5129,2507 5129,1338.83 4820.17,1030 4338,1030 3925,1443 3925,1940 3867.35,1997.65 3867.35,2403.97 3951.37,2488 R21.2 4074.73,2663.36
NetC21_1: C21.1 R12.2 R20.1 U7.1 | length 1438.7
  Top Layer w24: C21.1 5887.57,2975.47 5930,2933.05 v1(5930,2930) 5934.97,2925.03 5973.97,2925.03 6010,2889 6010,2452 6032,2430 6212,2430 6292,2350 R20.1 ; 5982.01,2919.97 6015.29,2953.25 6043.25,2953.25 R12.2
  Bottom Layer w24: U7.1 5745,2745 v1(5930,2930)
NetC21_2: C21.2 Q4.6 R12.1 U7.2 | length 1900.3
  Top Layer w24: Q4.6 5555,2595 5668,2708 ; U7.2 5700,2580 5668,2612 5668,2708 ; R12.1 5946.22,3047.74 5933,3034.53 C21.2 5823,3402 5695,3402 5668,3375 5668,2708
NetC26_1: C26.1 D2.1 P1.2 R20.2 | length 3150.6
  Top Layer w24: P1.2 5969.72,3315.28 6238,3047 v1@6238,2580.37 ; v1(6238,2565) v1@6238,2580.37 ; R20.2 6411.37,2407 v1@6238,2580.37 ; v1(6511,2565) D2.1 6640,2419.55 6656.55,2403 C26.1
  Bottom Layer w24: v1(6238,2565) v1(6511,2565)
NetC28_1: C28.1 P2.7 U8.3 | length 2112.8
  Top Layer w24: P2.7 2706.34,1668.34 2950,1912 2950,2376.3 U8.3 3460,2513.7 3460,2350 3545.98,2264.02 C28.1
NetC31_1: C31.1 R27.1 | length 1274.4
  Top Layer w24: C31.1 3942.05,2174 4065,2174 4136,2103 4425,2103 4450,2078 4450,1928 4425,1903 4383,1903 4355,1875 4355,1800 4500,1655 R27.1
NetC31_2: C31.2 C41.1 Q6.3 R33.2 U10.2 | length 2749.2
  Top Layer w24: C31.2 4001.1,2075 4026.1,2050 U10.2 4087.74,1735.34 R33.2 4122.88,1575.13 4493.87,1575.13 4599,1470 Q6.3 4496.72,1446.72 C41.1
NetC36_1: C36.1 R24.2 R32.1 U11.1 | length 1992.7
  Top Layer w24: U11.1 5703.7,1525 5750.31,1478.39 5750.31,1328.7 5725,1303.39 5663.88,1303.39 5657.09,1296.61 5657.09,1203.39 5750.31,1203.39 5829.32,1282.4 5829.32,1426.32 5900,1497 6000.47,1497 ; R24.2 5876.37,1890.9 5805.47,1820 C36.1 5805.47,1692 6000.47,1497 ; R32.1 6268.63,1428.37 6200,1497 6000.47,1497
NetC36_2: C36.2 Q6.6 R24.1 U11.2 | length 1182
  Top Layer w24: Q6.6 5683.7,1470 U11.2 ; R24.1 5793.63,2027 5923,2027 5923,1846.47 5864.53,1788 C36.2 v1(5934.11,1680.41)
  Bottom Layer w24: U11.2 v1(5934.11,1680.41)
NetC40_1: C40.1 D3.1 P1.3 R32.2 | length 6111.2
  Top Layer w24: P1.3 6087.83,4650 6024.83,4713 5758,4713 5215,4170 5215,3206 5259.56,3161.44 5259.56,1432.44 5556.61,1135.39 6666.39,1135.39 6681,1150 6681,1265 C40.1 ; R32.2 6396.37,1265 C40.1 ; D3.1 C40.1
NetC42_1: C42.1 P2.6 U12.3 | length 1626.3
  Top Layer w24: v1(2776,1583) 2824.45,1534.55 P2.6 ; U12.3 3749.24,1463.16 3749.24,1243.76 3795.47,1197.53 C42.1
  Bottom Layer w24: v1(2776,1583) 2898,1705 U12.3
NetP1_7: P1.7 P5.4 | length 6693
  Top Layer w24: P5.4 1412,3537.17 1412,4524 1473,4585 1727,4585 1767,4625 1767,4686 1983,4902 6152,4902 6372,4682 6372,4508 6400,4480 6560.28,4480 P1.7
NetP1_8: P1.8 P5.3 | length 7142.2
  Top Layer w24: P5.3 1332,3419.05 1332,4699 v1(1593,4960) ; v1(6613,4424) 6678.39,4489.39 P1.8
  Bottom Layer w24: v1(1593,4960) 2661,4960 3197,4424 v1(6613,4424)
NetP3_1: P3.1 U2.14 | length 2363.9
  Top Layer w24: v1(2095,3535) U2.14
  Bottom Layer w24: v1(2095,3535) 2095,3445.78 2306,3234.78 2306,1545.25 P3.1
NetP3_2: P3.2 U2.13 | length 2924.6
  Top Layer w24: v1(2045,3480) U2.13
  Bottom Layer w24: P3.2 2087.22,1334 2200,1334 2340,1474 2340,3300 2215,3425 2215,3551 2171,3595 2075,3595 2045,3565 v1(2045,3480)
NetP3_3: P3.3 U2.12 | length 2476.4
  Top Layer w24: v1(1960,3488) 1995,3523 U2.12
  Bottom Layer w24: P3.3 1861.11,1442 1775,1442 1743,1474 1743,1664 1773,1694 1773,1862 2007,2096 2007,3441 v1(1960,3488)
NetP3_4: P3.4 U6.14 | length 1543.9
  Top Layer w24: v1(2081,2560) 2081.26,2560.26 U6.14
  Bottom Layer w24: P3.4 1848,1337 1966,1337 1966,1568 2081,1683 v1(2081,2560)
NetP3_5: P3.5 U6.13 | length 2704.3
  Top Layer w24: v1(1733,2553) 1778,2508 1995.2,2508 2031.26,2544.06 U6.13
  Bottom Layer w24: P3.5 1606.31,1318 1500,1318 1410,1408 1410,2723 1504,2817 1733,2817 v1(1733,2553)
NetP3_6: P3.6 U6.12 | length 1487.9
  Top Layer w24: P3.6 1507,1441.78 1507,1723.53 1540,1756.53 1540,1844 v1(1600,1904) ; v1(1960,2555) 1960,2559.81 1981.26,2581.07 U6.12
  Bottom Layer w24: v1(1600,1904) 1760.75,2064.75 1791.22,2064.75 1960,2233.53 v1(1960,2555)
NetP3_9: P3.9 U9.12 | length 566.1
  Top Layer w24: U9.12 1900,1620 1925,1595 2019,1595 2084,1530 2084,1477 2055,1448 1973.22,1448 P3.9
NetP3_10: P3.10 U9.13 | length 271.3
  Top Layer w24: v1(1947,1642) 1950,1645 U9.13
  Bottom Layer w24: P3.10 1930.31,1642 v1(1947,1642)
NetP3_11: P3.11 U9.14 | length 757.6
  Top Layer w24: P3.11 1629,1556 1629,1792.65 1651.35,1815 v1(1820,1815) ; v1(1965,1785) 1969.97,1780.03 1969.97,1757.28 2000,1727.25 U9.14
  Bottom Layer w24: v1(1820,1815) 1892,1815 1917.03,1789.97 1960.03,1789.97 v1(1965,1785)
NetP4_1: P4.1 R19.1 | length 2227.8
  Top Layer w24: v1(1801,3474) 1801,3364.69 R19.1
  Bottom Layer w24: P4.1 1611.42,4700 1649.42,4738 2189,4738 2233,4694 2233,4155 2034,3956 2034,3707 v1(1801,3474)
NetP4_2: P4.2 R16.1 | length 1672.6
  Top Layer w24: v1(1760,3532) 1826.07,3532 2000,3358.07 R16.1
  Bottom Layer w24: P4.2 1760.78,4598 1850,4598 1879,4569 1879,4206 1738,4065 1738,3554 v1(1760,3532)
NetP4_3: P4.3 R13.1 | length 3001.4
  Top Layer w24: v1(2281,3470) 2281,3368.07 R13.1
  Bottom Layer w24: P4.3 1773.89,4703 1675,4703 1649,4677 1649,4625 1616,4592 1538,4592 1538,4800 1640,4902 2193,4902 2437,4658 2437,3860 2281,3704 v1(2281,3470)
NetP4_4: P4.4 R10.1 | length 537.4
  Top Layer w24: R10.1 1774,4268.07 1774,4562.72 1810.06,4598.79 1847.69,4598.79 1899.61,4650.71 P4.4
NetP4_5: P4.5 R6.1 | length 453.1
  Top Layer w24: R6.1 2098,4248.07 v1(2115,4469)
  Bottom Layer w24: P4.5 2115,4598.11 v1(2115,4469)
NetP4_6: P4.6 R3.1 | length 421.8
  Top Layer w24: P4.6 2300,4531.22 R3.1
NetP4_7: P4.7 R23.1 | length 2753.7
  Top Layer w24: v1(1589.96,3833.96) 1558,3802 1558,2630 1741.23,2446.77 R23.1
  Bottom Layer w24: v1(1589.96,3833.96) P4.7
NetP4_8: P4.8 R26.1 | length 2741.8
  Top Layer w24: P4.8 1509,4333.53 1509,2450 1547,2412 1859.39,2412 1956,2315.39 R26.1
NetP4_9: P4.9 R29.1 | length 2463.6
  Top Layer w24: R29.1 1789.19,2309.19 1865.81,2309.19 v1(1870,2305)
  Bottom Layer w24: P4.9 1670,4376.42 1670,2931 1870,2731 v1(1870,2305)
NetQ1_1: Q1.1 Q2.1 | length 329.3
  Top Layer w24: Q1.1 4759,4051 4759,3925 4799,3885 Q2.1
NetQ1_2: Q1.2 R2.2 | length 340
  Top Layer w24: R2.2 4450,4360 Q1.2
NetQ2_2: Q2.2 R5.2 | length 384.3
  Top Layer w24: R5.2 4651,3770.08 4665.92,3785 Q2.2
NetQ3_1: Q3.1 Q4.1 | length 368.1
  Top Layer w24: Q4.1 5050,2795 5210,2955 Q3.1
NetQ3_2: Q3.2 R14.2 | length 640.6
  Top Layer w24: v1(4649.37,3090) R14.2
  Bottom Layer w24: v1(4649.37,3090) Q3.2
NetQ4_2: Q4.2 R18.2 | length 371.5
  Top Layer w24: R18.2 4801,2715.08 4821.08,2695 Q4.2
NetQ5_1: Q5.1 Q6.1 | length 298.2
  Top Layer w24: Q6.1 5013.82,1670 5013.82,1814.67 5020,1820.85 Q5.1
NetQ5_2: Q5.2 R27.2 | length 448
  Top Layer w24: R27.2 4709.37,1734.37 Q5.2
NetQ6_2: Q6.2 R31.2 | length 552.6
  Top Layer w24: R31.2 4834,1355.08 4900.92,1422 5060.23,1422 5060.23,1518 5008.23,1570 Q6.2
NetR3_2: R3.2 R4.1 U2.3 | length 873.2
  Top Layer w24: U2.3 v1(2095,3916) ; R4.1 2216.37,4170 2247.99,4201.61 2309.84,4201.61 2376.46,4135 v1(2380,4135)
  Bottom Layer w24: v1(2095,3916) 2314,4135 v1(2380,4135)
NetR6_2: R6.2 R8.1 U2.4 | length 460.8
  Top Layer w24: U2.4 2045,3926.37 1966.37,4005 R8.1 1966.37,4071.37 2066.3,4171.3 R6.2
NetR9_1: R9.1 U4.1 U4.2 | length 391.8
  Top Layer w24: U4.2 U4.1 3220,4176.3 R9.1
NetR10_2: R10.2 R11.1 U2.5 | length 626.3
  Top Layer w24: v1(1785,4016) 1706.37,4094.63 R11.1 1706.37,4150 1747.67,4191.3 R10.2 ; v1(1891.35,3928) 1995,3824.35 U2.5
  Bottom Layer w24: v1(1785,4016) 1785,3993 1850,3928 v1(1891.35,3928)
NetR13_2: R13.2 R15.1 U6.3 | length 747.6
  Top Layer w24: U6.3 2081.26,3202.26 2170.3,3291.3 2257.63,3291.3 ; R15.1 2257.63,3291.3 ; R13.2 2257.63,3291.3
NetR16_2: R16.2 R17.1 U6.4 | length 483.3
  Top Layer w24: U6.4 2031.26,2883 2007.63,2906.63 R17.1 2047.26,3204.31 2047.26,3281.3 R16.2
NetR19_2: R19.2 R22.1 U6.5 | length 687.3
  Top Layer w24: v1(1721.26,2986) R22.1 1721.26,3197.91 R19.2 ; v1(1862.26,2986) 1981.26,2867 U6.5
  Bottom Layer w24: v1(1721.26,2986) v1(1862.26,2986)
NetR21_1: R21.1 U8.1 U8.2 | length 868.8
  Top Layer w24: U8.2 U8.1 ; R21.1 v1(3868.63,2653)
  Bottom Layer w24: U8.2 3420.7,2653 v1(3868.63,2653)
NetR23_2: R23.2 R25.1 U9.3 | length 898.8
  Top Layer w24: U9.3 2000,2065 2099,2164 2099,2269 2200,2370 2251.37,2370 ; R25.1 2251.37,2370 ; R23.2 2251.37,2370
NetR26_2: R26.2 R28.1 U9.4 | length 397.8
  Top Layer w24: U9.4 1950,1994 R28.1 1965,2213.61 1990,2238.61 R26.2
NetR29_2: R29.2 R30.1 U9.5 | length 529.5
  Top Layer w24: R30.1 1696.37,2170 1739,2170 1757.38,2151.62 ; R29.2 1762.99,2236.61 1757.38,2151.62 ; U9.5 1900,2009 1757.38,2151.62
NetR33_1: R33.1 U12.1 U12.2 | length 969.8
  Top Layer w24: U12.2 U12.1 ; R33.1 4005,1487 4052.06,1487 v1(4085.06,1454)
  Bottom Layer w24: U12.2 3760.4,1552 3987.06,1552 v1(4085.06,1454)
PGND: C2.2 C5.1 C9.2 C10.1 C11.2 C13.2 C14.2 C18.2 C19.1 C20.2 C22.1 C23.2 C27.2 C28.2 C29.2 C30.1 C34.2 C35.1 C39.2 C41.2 C42.2 P2.1 P3.7 Q1.3 Q2.4 Q3.3 Q4.4 Q5.3 Q6.4 U1.3 U1.8 U2.9 U2.15 U4.8 U5.3 U5.8 U6.9 U6.15 U8.8 U9.9 U9.15 U10.3 U10.8 U12.8 | length 25851.3
  Top Layer w24: v1(1473,1756) 1473,1400 ; v1(1626,2710) 1768,2710 ; v1(1710,1718) 1750,1718 U9.9 ; U6.9 1831.26,2710 ; U9.15 2050,1612.08 2118,1544.08 2118,1539.44 P3.7 ; U6.15 2131.26,2678.74 2100,2710 1831.26,2710 ; U2.15 2145,3658 1845,3658 U2.9 1845,3589 1631,3589 1592,3550 1592,2886 1768,2710 ; C29.2 2691.19,2128.28 C30.1 2581,2042.09 2581,1938.36 P3.7 ; C14.2 2875.39,3552.47 2850,3527.09 2850,3237.09 2875,3212.09 C10.1 3077.91,3225 C9.2 3226,3225 3226,3350 3185,3391 3185,3491 ; C35.1 3210,1612.09 C34.2 3409,1655 3415,1649 P2.1 3415,1335 ; C22.1 3180,2072.09 3224.47,2116.55 C20.2 3532.55,2116.55 3641,2225 ; C2.2 3296.72,3491 3185,3491 ; U4.8 3221.3,3865 ; C5.1 3580.91,3352.09 ; U1.3 3500,3865 3221.3,3865 ; C27.2 3713.28,3026.9 3648.09,3092.09 ; U1.8 3966.6,3911 ; U5.3 3983.45,2823.95 3983.45,2908.64 ; C11.2 4258.45,3911 3966.6,3911 ; C41.2 v1(4493.85,1383.28) ; U5.8 4786.72,2900 4836.72,2950 C23.2 4836.72,3140 ; C39.2 v1(4762.13,1115) 4844,1196.87 4844,1314 4900,1370 Q6.4 5064.23,1370 5094.23,1400 5094.23,1970.77 Q5.3 4993.15,2071.85 Q4.4 ; Q2.4 4848.15,3297.43 4836.72,3286 4836.72,3140 ; Q3.3 4836.72,3140 ; 1473,1400 1473,1244 1582,1135 2117,1135 2202,1220 2202,1335 ; 1473,1400 1538,1335 2202,1335 ; 1768,2710 1831.26,2710 ; P3.7 2202,1455.44 2202,1335 ; 2202,1335 3415,1335 ; 3185,3491 3185,3828.7 3221.3,3865 ; 3415,1335 3571,1335 3781,1125 3851,1125 3876,1150 3876,1260.98 C42.2 3825,1373 3867,1415 3867,1858 U12.8 3641,2084 3641,2225 ; 3580.91,3352.09 U8.8 3633,2853.3 3633,2553 3590,2510 C28.2 3641,2327.47 3641,2225 ; 3580.91,3352.09 3627,3306 3627,3113.17 3648.09,3092.09 ; 3648.09,3092.09 C19.1 3800,3092.09 3983.45,2908.64 ; 3966.6,3911 4151.72,3725.87 C13.2 4151.72,3286.72 4090,3225 C18.2 3983.45,2908.64
  Bottom Layer w24: v1(1626,2710) 1510,2594 ; v1(1710,1718) 1664,1764 ; U1.3 3717.6,3760 U1.8 4177.6,4220 Q1.3 ; U12.8 4357.4,1905 U10.3 4515,1950 U10.8 4915,2150 Q5.3 ; U5.3 4307.4,2900 U5.8 ; v1(4493.85,1383.28) v1(4762.13,1115) ; 1510,2594 1473,2557 v1(1473,1756) 1481,1764 1664,1764 ; 1510,2594 1510,1918 1664,1764
pads on no net: P1.MP1 P1.MP2 P2.3 P2.4 P2.5 P2.MP1 P2.MP2 P3.12 P3.MH1 P3.MH2 P4.10 P4.11 P4.MH1 P4.MH2 P5.2 P5.MP1 P5.MP2 Q2.7 Q2.8 Q4.7 Q4.8 Q6.7 Q6.8 U1.1 U1.5 U1.6 U1.7 U2.6 U2.7 U2.10 U2.11 U3.5 U3.6 U3.7 U4.5 U4.6 U4.7 U5.1 U5.5 U5.6 U5.7 U6.6 U6.7 U6.10 U6.11 U7.5 U7.6 U7.7 U8.5 U8.6 U8.7 U9.6 U9.7 U9.10 U9.11 U10.1 U10.5 U10.6 U10.7 U11.5 U11.6 U11.7 U12.5 U12.6 U12.7